# Altium PCB MoonPilot_Barometer.PcbDoc
Units mm, origin at the board's own origin, x right, y up, seen from the top; angles counter-clockwise.
Board outline 20 x 20 mm, 2 copper layers (Top Layer, Bottom Layer); 11 components, 6 nets, 39 pads, 21 vias.
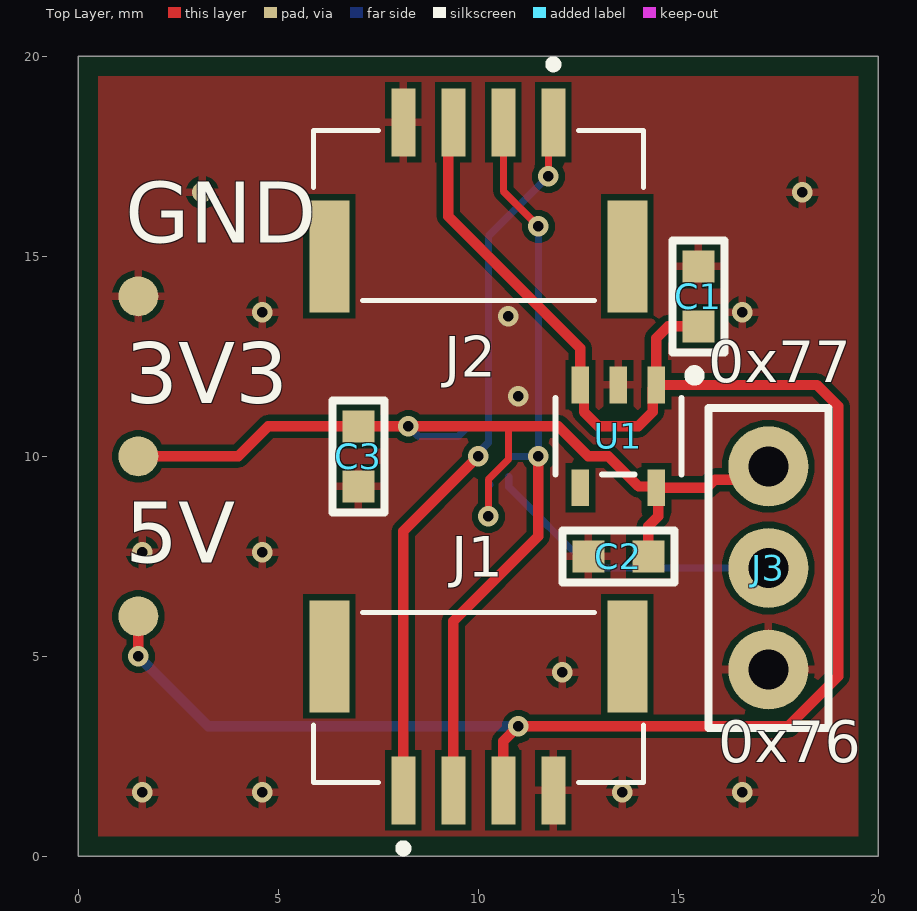
[diagram p0: Top Layer view]
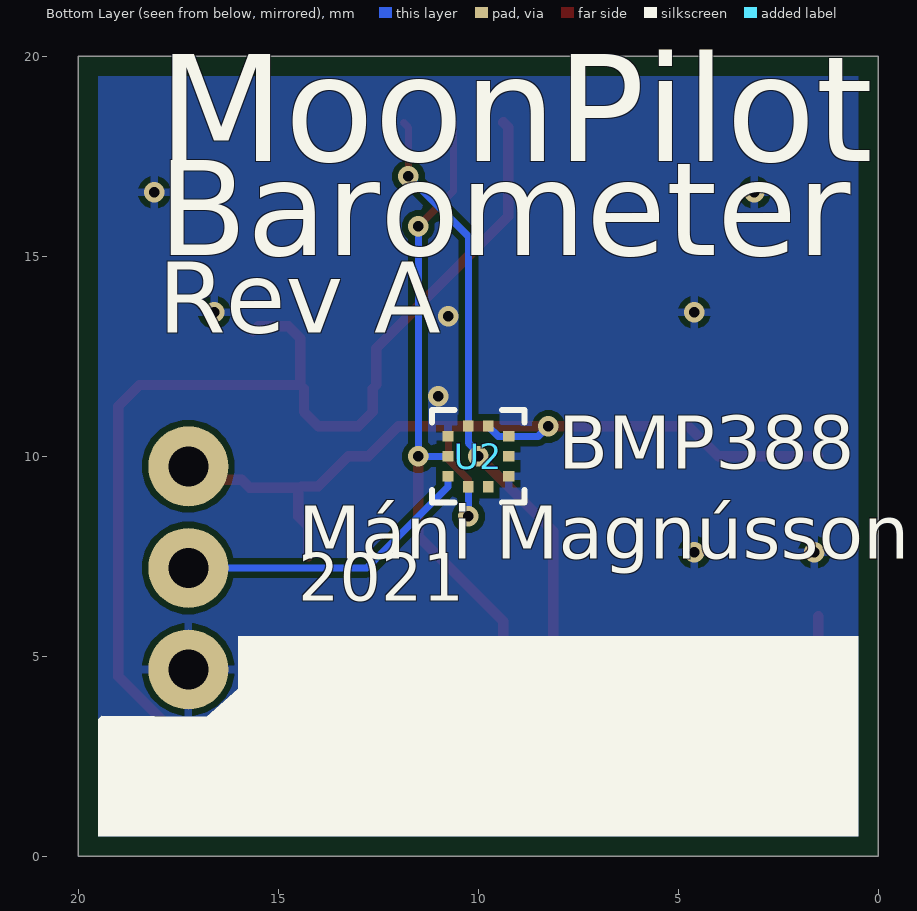
[diagram p1: Bottom Layer view, seen from below]
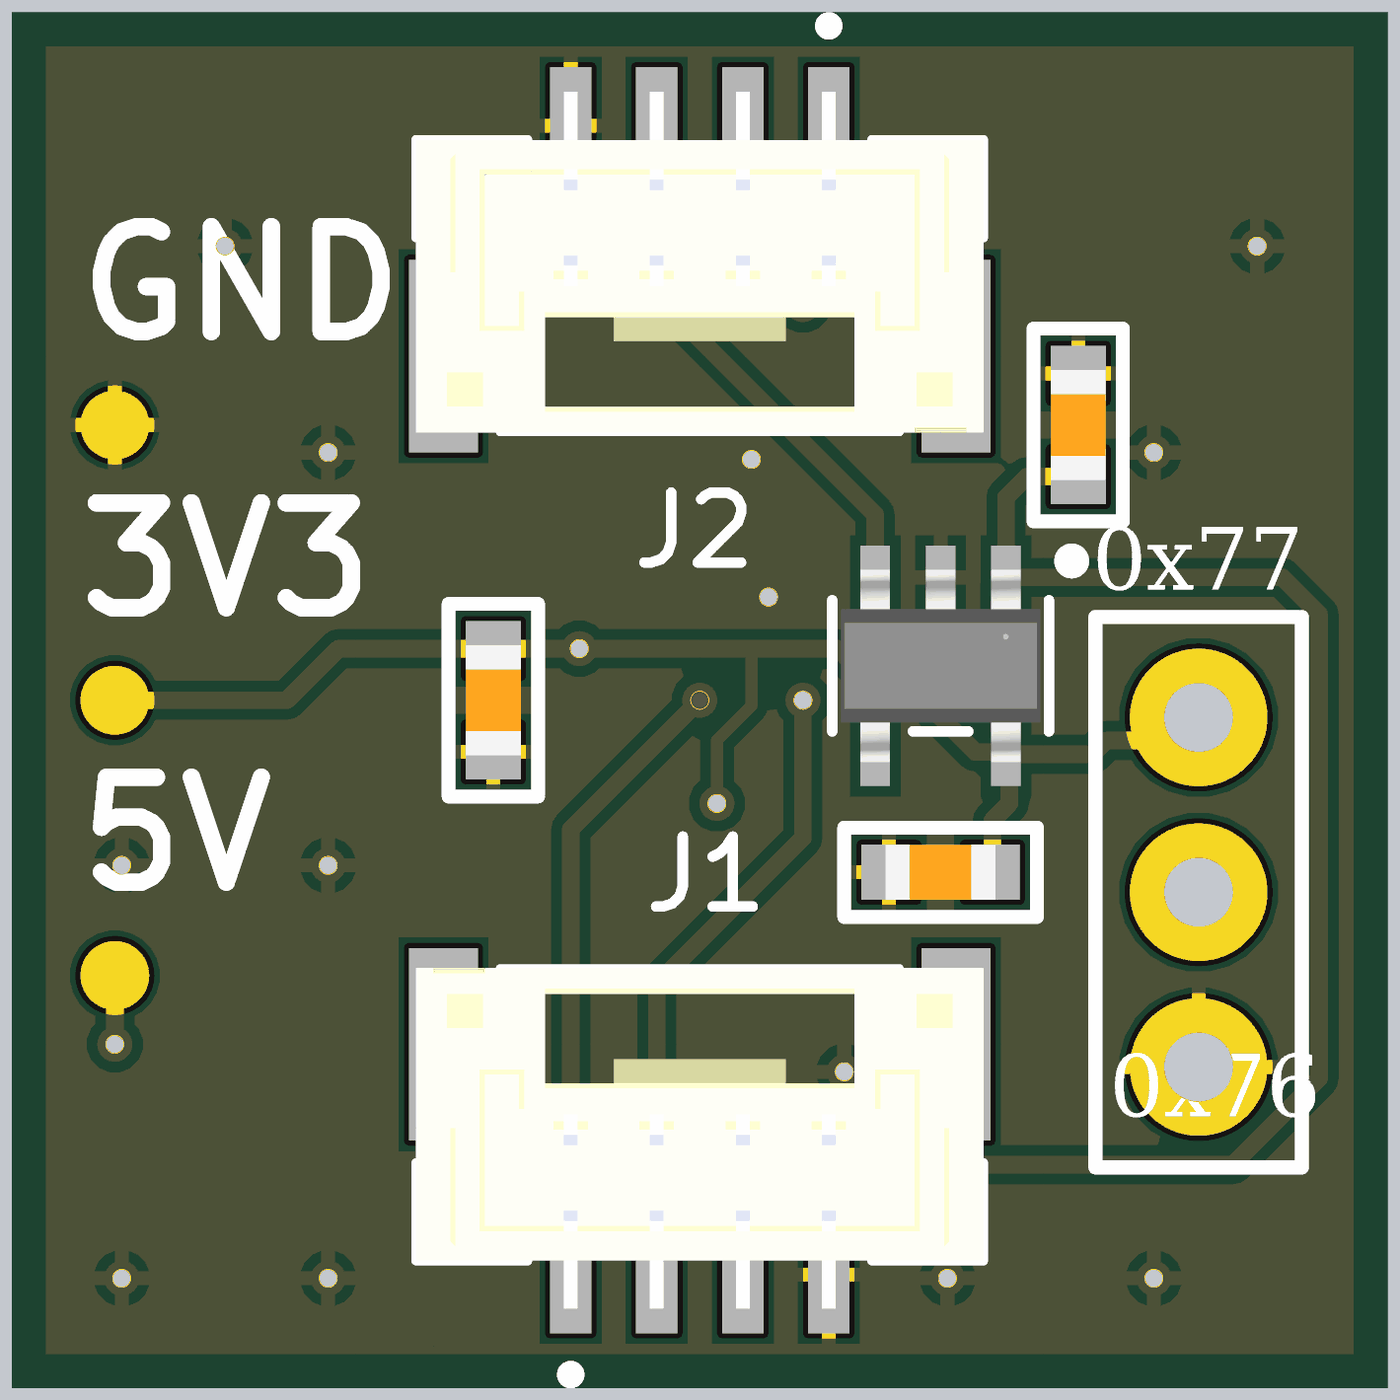
[diagram p2: 3D render of the assembled board from above, using the file's embedded part models]

## Layer stack, top to bottom
Top Solder: solder mask 0.0102, Solder Resist, Dk 3.5
Top Layer: signal copper 0.0356
Dielectric 1: dielectric 0.32, FR-4, Dk 4.8
Bottom Layer: signal copper 0.0356
Bottom Solder: solder mask 0.0102, Solder Resist, Dk 3.5

## Board outline
0,0 20,0 20,20 0,20

## Design rules (kind name [scope] priority, off if disabled: settings)
BoardOutlineClearance [All] p1: gap=0.381 ignorepadtopadclearanceinfootprint=FALSE
Clearance [All] p1: gap=0.152 ignorepadtopadclearanceinfootprint=FALSE except(0: Arc-Hole Track-Hole SMDPad-Hole THPad-Hole Via-Hole Fill-Hole Poly-Hole Region-Hole Text-Hole)
ComponentClearance [All] p1: gap=0.025 collisioncheckmode=3 verticalgap=0.025 showdistances=FALSE
DiffPairsRouting [All] p1: maxlimit=10 minlimit=0.152 mostfreqgap=0.203 toplayer_minwidth=0.152 toplayer_maxwidth=0.381 toplayer_prefwidth=0.203 bottomlayer_minwidth=0.152 bottomlayer_maxwidth=0.381 bottomlayer_prefwidth=0.203 maxuncoupledlength=12.7
HoleSize [All] p1: absolutevalues=TRUE maxlimit=6.731 minlimit=0.33 maxpercent=80.000 minpercent=20.000
HoleToHoleClearance [All] p1: gap=0.254 allowstackedmicrovias=FALSE
MinimumAnnularRing [All] p1: minimumring=0.178
MinimumSolderMaskSliver [All] p1: minsoldermaskwidth=0
PlaneClearance [All] p1: clearance=0.254
PlaneConnect [All] p1: planeconnectstyle=Direct reliefexpansion=0.406 reliefentries=4 reliefconductorwidth=0.152 reliefairgap=0.152
PolygonConnect [All] p1: connectstyle=Relief reliefconductorwidth=0.203 reliefentries=4 polygonreliefangle="90 Angle" airgapwidth=0.152
RoutingCorners [All] p1: cornerstyle=45-Degree minsetback=1.25 maxsetback=1.25
RoutingVias [All] p1: holewidth=0.381 width=0.762 viastyle="Through Hole" minholewidth=0.254 minwidth=0.508 maxholewidth=2.54 maxwidth=2.896
SilkToSilkClearance [All] p1: silktosilkclearance=0
SilkToSolderMaskClearance [IsPad] p1: minsilkscreentomaskgap=0.152 clearancetoexposedcopper=TRUE
SolderMaskExpansion [All] p1: expansion=0.075 istentingtop=FALSE
Width [All] p1: maxlimit=10.16 minlimit=0.152 preferedwidth=0.203
20 further rules are at their usual default settings.

## Components (designator, comment, footprint, x,y, rotation, side; value= is the part's Value field where it differs from the comment)
3V3 "3.3V" Testpoint2 1.5,10 r90 top (schematic designator TP3)
5V "5V" Testpoint2 1.5,6 r180 top (schematic designator TP2)
C1 "1µF" 0603_CAP 15.5,14 r90 top
C2 "2.2µF" 0603_CAP 13.5,7.5 r180 top
C3 "100nF" 0603_CAP 7,10 r270 top
GND "GND" Testpoint2 1.5,14 r90 top (schematic designator TP1)
J1 "4 pin vertical JST GH" JST_BM04B-GHS-TBT(LF)(SN)(N) 10,5 r180 top
J2 "4 pin vertical JST GH" JST_BM04B-GHS-TBT(LF)(SN)(N) 10,15 r0 top
J3 "Generic 3 pin 100 mil header" HEADER-3-POS_100_mil 17.25,7.21 r270 top
U1 "3.3V linear regulator 700mA" SOT-25_TOR 13.5,10.5 r270 top
U2 "BMP388" QFN_BMP388_BOS 10,10 r180 bottom

## Footprints (in the part's own frame and the unit in brackets; to place one, negate y for a bottom-side part, rotate by r counter-clockwise, add the part's x,y. Pads: shape width x height; smd on the part's side, far side on the other; paste and mask are expansions set on the pad)
0603_CAP [mm] "0603 capacitor"
  rect 0.8x0.8 smd: 1(-0.75,0) 2(0.75,0)
  silkscreen extent -1.4,-0.65 1.4,0.65, body extent -0.8,-0.4 0.8,0.4, height 0.7
HEADER-3-POS_100_mil [mm]
  round 2 hole 1: 1(-2.54,0) 2(0,0) 3(2.54,0)
  silkscreen extent -4,-1.5 4,1.5
JST_BM04B-GHS-TBT(LF)(SN)(N) [mm]
  rect 0.6x1.7 smd: 1(1.875,3.35) 2(0.625,3.35) 3(-0.625,3.35) 4(-1.875,3.35)
  rect 1x2.8 smd: S1(-3.725,0) S2(3.725,0)
  silkscreen extent -4.13,-1.1 4.13,4.9, body extent -4.12,-1.11 4.13,3.84, height 4.15
QFN_BMP388_BOS [mil]
  rect 10x11 smd paste+0 mask+0: 1(9.84,30) 2(-9.84,30) 6(-9.84,-30) 7(9.84,-30)
  rect 11x10 smd paste+0 mask+0: 3(-30,19.68) 4(-30,0) 5(-30,-19.69) 8(30,-19.69) 9(30,0) 10(30,19.68)
  silkscreen extent -46,-46 46,46, body extent -41,-41 41,41, height 32
SOT-25_TOR [mil]
  rect 36.28x17 smd paste+0 mask+0: 1(-50.64,37.4) 2(-50.64,0) 3(-50.64,-37.4) 4(50.64,-37.4) 5(50.64,37.4)
  silkscreen extent -65,-62 38,80, body extent -55,-57 55,57, height 51
Testpoint2 [mm] "Testpoint2"
  round 1 smd paste-1.5: 1(0,0)

## Part data
3V3 5V GND: library part Testpoint
C1 C2 C3: library part Capacitor
J1 J2: library part BM04B-GHS-TBT(LF)(SN)(N), "JST GH vertical 4 pin / DigiKey part no. 455-1580-1-ND", Package=None, Digi-Key_Part_Number=455-1580-1-ND, Digi-Key_Purchase_URL=https://www.digikey.com/product-detail/en/jst-sales-america-inc/BM04B-GHS-TBT_LF__SN__N_/455-1580-1-ND/807848?utm_source=snapeda&utm_medium=aggregator&utm_campaign=symbol, MF="JST Sales", MP=BM04B-GHS-TBT_LF__SN__N_, SnapEDA_Link=https://www.snapeda.com/parts/BM04B-GHS-TBT%28LF%29%28SN%29%28N%29/JST%20Sales%20America%20Inc./view-part/841999/?ref=snap
J3: library part "3 pin 100 mil header"
U1: library part XC6222B331MR-G, "Digikey part no. 893-1143-1-ND", Built_By=EMA_UL_Team, Copyright="Copyright (C) 2018 Accelerated Designs. All rights reserved", Manufacturer_Part_Number=XC6222B331MR-G, RefDes=RefDes, SourceLibrary=Torex_2016-07-11_1, Type=DEV, Vendor="Torex Semiconductor"
U2: "No Description Available", Copyright="Copyright (C) 2018 Accelerated Designs. All rights reserved", Manufacturer_Part_Number=BMP388, RefDes=RefDes, SourceLibrary=Bosch_2019-11-06, Type=DEV, Vendor=Bosch

## Via types
v1: diameter 0.508, hole 0.254, Top Layer to Bottom Layer, tented both sides, 21 vias

## Nets (pads, with @x,y where several pads share a name; then routed paths per layer and width w, separated by ;. In a path a pad name is that pad's centre, name@x,y a point inside that pad or via, vN(x,y) a via of type N, cw(c..) or ccw(c..) an arc to the next point about the centre after c; other vN are vias at no path point)
+3.3V: 3V3.1 C2.1 C3.1 J3.1 U1.5 U2.1 U2.6 U2.10 | length 23.7
  Top Layer w0.178: v1(10.25,8.5) 10.25,9.42 10.75,9.92 10.75,10.75
  Top Layer w0.254: 3V3.1 4,10 4.75,10.75 C3.1 v1(8.25,10.75) 10.75,10.75 12,10.75 12.75,10 13.25,10 14.002,9.248 14.416,9.248 U1.5 ; C2.1 14.25,8.25 14.5,8.5 14.5,9.164 U1.5 ; J3.1 16.916,9.416 15.916,9.416 15.714,9.214 U1.5
  Bottom Layer w0.178: v1(8.25,10.75) 8.5,10.5 U2.10 9.501,10.5 9.75,10.749 U2.1 ; v1(10.25,8.5) U2.6 10.25,9.251 U2.6@10.288,9.289
+5V: 5V.1 C1.1 J1.3 J2.3 U1.1 U1.3 | length 46.8
  Top Layer w0.254: v1(1.5,5) 5V.1 ; J2.3 9.25,18.225 9.25,16 12.55,12.7 U1.3 ; J1.3 10.625,2.875 v1(11,3.25) 17.75,3.25 19,4.5 19,11.25 18.464,11.786 U1.1 ; U1.3@12.639,11.697 12.639,11.111 13,10.75 14,10.75 14.361,11.111 14.361,11.697 U1.1 ; C1.1@15.632,13.118 C1.1 14.75,13.25 14.45,12.95 U1.1
  Bottom Layer w0.254: v1(1.5,5) 3.25,3.25 v1(11,3.25)
GND: C1.2 C2.2 C3.2 GND.1 J1.4 J2.4 J3.3 U1.2 U2.3 U2.8 U2.9
  other v1: 1.6,1.6 4.6,1.6 13.6,1.6 16.6,1.6 12.1,4.6 1.6,7.6 4.6,7.6 11,11.5 10.75,13.5 4.6,13.6 16.6,13.6 3.1,16.6 18.1,16.6
NetJ3_2: J3.2 U2.5 | length 7.6
  Bottom Layer w0.178: U2.5 10.762,9.238 12.79,7.21 J3.2
SCL: J1.1 J2.1 U2.2 | length 18.3
  Top Layer w0.178: v1(11.75,17) 11.75,18.225 J2.1
  Top Layer w0.254: J1.1 8.125,8.125 v1(10,10)
  Bottom Layer w0.178: v1(10,10) 10,10.089 10.25,10.339 U2.2 10.25,15.5 v1(11.75,17)
SDA: J1.2 J2.2 U2.4 | length 18.7
  Top Layer w0.178: J2.2 10.625,16.625 v1(11.5,15.75)
  Top Layer w0.254: J1.2 9.375,5.875 11.5,8 v1(11.5,10)
  Bottom Layer w0.178: U2.4 v1(11.5,10) v1(11.5,15.75)
pads on no net: J1.S1 J1.S2 J2.S1 J2.S2 U1.4 U2.7

## Polygon pours and split planes (outlines as drawn)
GND on Top Layer "GND_L01_P000" (solid, pour order 0): 0.5,0.5 0.5,19.5 19.5,19.5 19.5,0.5
GND on Bottom Layer "GND_L02_P001" (solid, pour order 1): 0.5,0.5 0.5,19.5 19.5,19.5 19.5,0.5
no net on Bottom Overlay "NONET_L03_P-001" (solid): 16,5.5 0.5,5.5 0.5,0.5 19.5,0.5 19.5,3.519 16.795,3.489 16,4.191

## Silkscreen, mask and mechanical layers (free items; w line width, h text height)
Top Overlay:
  text "0x77" at 15.75,11.5 h1.78
  text "0x76" at 16,2 h1.78
Bottom Overlay:
  text "MoonPilot" at 18,16.5 h4.57
  text "Barometer" at 18,14.25 h4.06
  text "Rev A" at 18,12.5 h3.05
  text "BMP388" at 8,9.25 h2.29
  text "Máni Magnússon" at 14.5,7 h2.29
  text "2021" at 14.5,6 h2.03
Mechanical 2:
  the board outline again, w0.127
  text "<- Board Edge" at 20.75,0.25 h1

## Text inside footprints (layer, text, board x,y; h text height)
U1: Mechanical 13 "*" at 13.663,11.389 h1.27 r270
U2: Mechanical 13 "*" at 9.619,10.254 h1.27